# EAGLE board InkTime_PCB (EAGLE 9.7.0), part 1 of 2
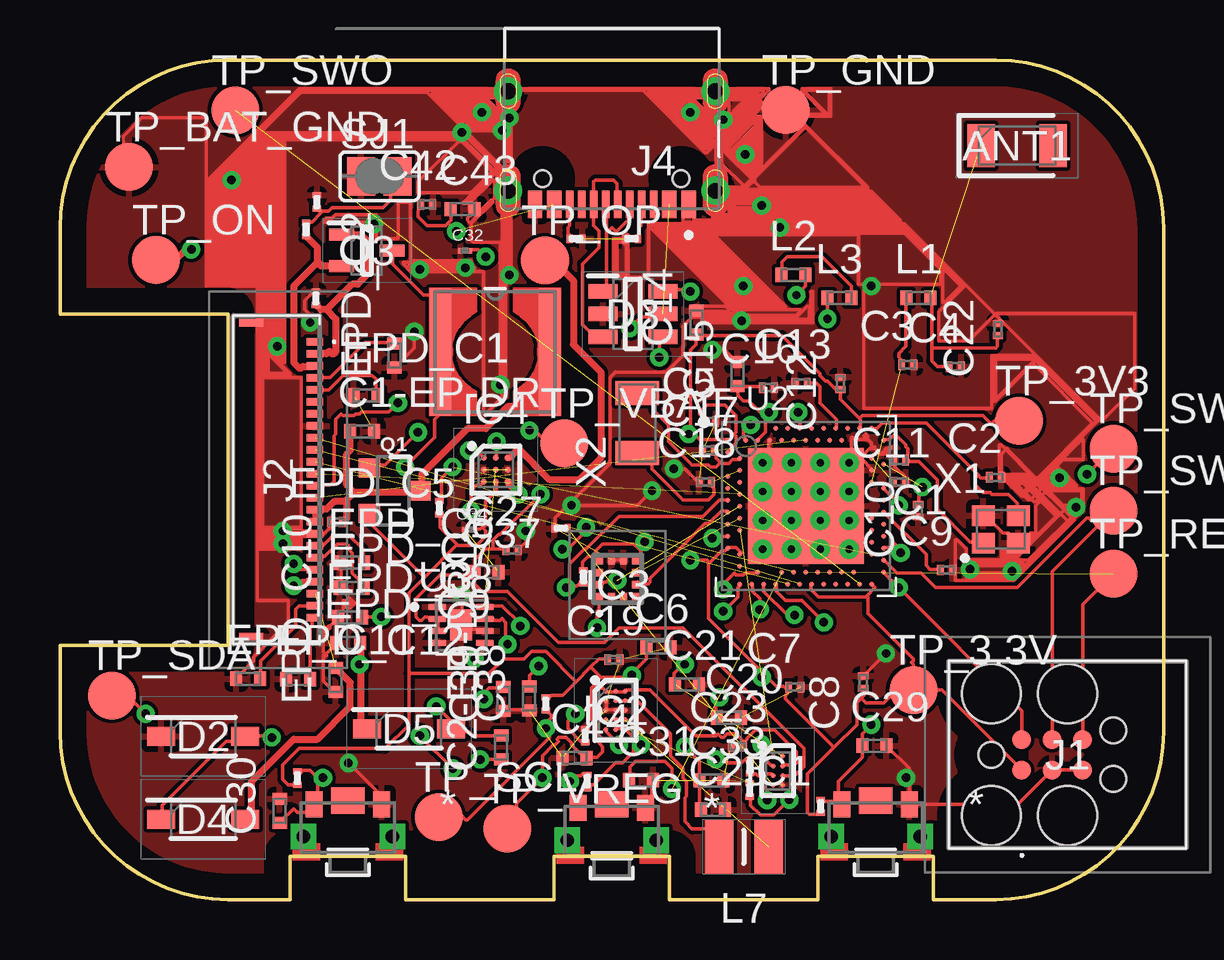
[diagram p0: board, top side]
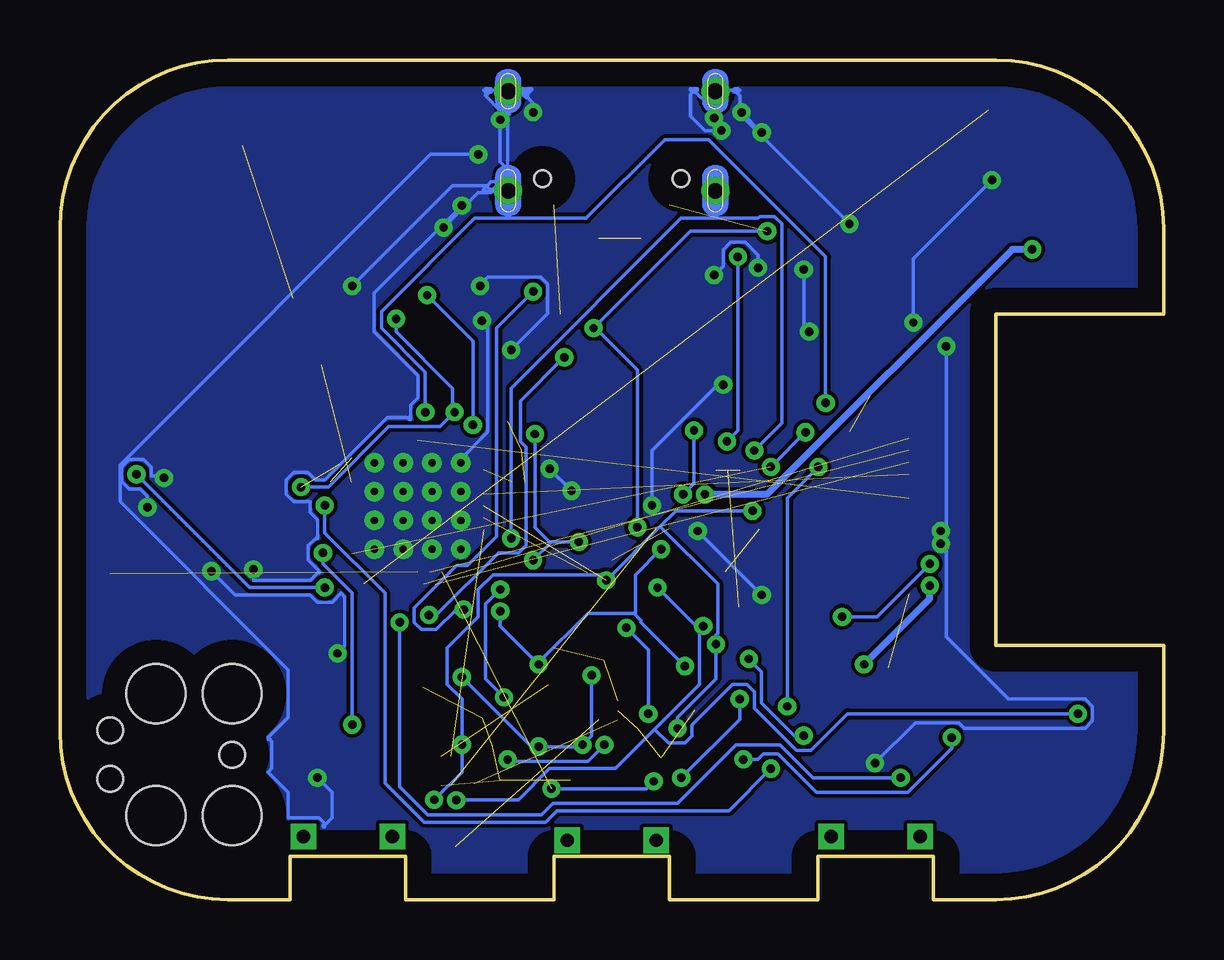
[diagram p1: board, bottom side, seen from below]

Size 46 x 35 mm. Coordinates in mm from the lower left corner, seen from the top.
Outline: 39,0 36.4,0 36.4,1.8 31.6,1.8 31.6,0 25.4,0 25.4,1.8 20.6,1.8 20.6,0 14.4,0 14.4,1.8 9.6,1.8 9.6,0 7,0 arc-90 0,7 0,10.6 7,10.6 7,24.4 0,24.4 0,28 arc-90 7,35 39,35 arc-90 46,28 46,7 arc-90 39,0
Copper layers (1*16): Top 0.035mm / dielectric 1.5mm / Bottom 0.035mm
Design rules "jlcpcb-2layers.dru": minimum track width 6mil, minimum drill 0.35mm, track to track 6mil, track to pad 6mil, pad to pad 6mil, via to via 6mil, smd to smd 6mil, copper to edge 40mil, drill to drill 6mil, minimum pad ring 10mil, minimum via ring 8mil, stop-mask expansion 4mil, vias tented up to drill 9999mil, thermal gap 10mil
Net classes: 1 Power: width 0.3 mm

## Footprints (pad centres in the part's own frame; a part is rotated, then mirrored left to right if it is on the bottom)
2450AT18B100E_ANTC3216X140N = smd 1.15 x 1.8: 1 -1.5,0; 2 1.5,0
NORDIC_NRF_3_RESC0201_L = smd 0.28 x 0.43: 1 -0.255,0; 2 0.255,0
NORDIC_NRF_3_RESC0402_L = smd 0.5 x 0.6: 1 -0.5,0; 2 0.5,0
GRM011R60J152KE01L_2_CAPC0201X13N = smd 0.22 x 0.23: 1 -0.185,0; 2 0.185,0
ESP32_C6_LIBRARY_5_SOD3716X135N = smd 1.15 x 0.8: 1 -1.75,0; 2 1.75,0
ESP32_C6_LIBRARY_3_SOT95P280X145-6N = smd 1.2 x 0.6: 1 -1.25,0.95; 2 -1.25,0; 3 -1.25,-0.95; 4 1.25,-0.95; 5 1.25,0; 6 1.25,0.95
BQ25180YBGR_BGA8C40P2X4_100X155X50 = smd 0.2 x 0.2: A1 -0.2,0.6; A2 0.2,0.6; B1 -0.2,0.2; B2 0.2,0.2; C1 -0.2,-0.2; C2 0.2,-0.2; D1 -0.2,-0.6; D2 0.2,-0.6
RT6160AWSC_BGA15C40P3X5_140X230X60 = smd 0.216 x 0.216: A1 -0.4,0.8; A2 0,0.8; A3 0.4,0.8; B1 -0.4,0.4; B2 0,0.4; B3 0.4,0.4; C1 -0.4,0; C2 0,0; C3 0.4,0; D1 -0.4,-0.4; D2 0,-0.4; D3 0.4,-0.4; E1 -0.4,-0.8; E2 0,-0.8; E3 0.4,-0.8
BMA423_BMA423 = smd 0.3 x 0.35: 1 -0.75,-0.775; 2 -0.25,-0.775; 3 0.25,-0.775; 4 0.75,-0.775; 7 0.75,0.775; 8 0.25,0.775; 9 -0.25,0.775; 10 -0.75,0.775 | smd 0.35 x 0.3: 5 0.775,-0.25; 6 0.775,0.25; 11 -0.775,0.25; 12 -0.775,-0.25
DRV2605YZFR_BGA9C50P3X3_144X144X62 = smd 0.25 x 0.25: A1 -0.5,0.5; A2 0,0.5; A3 0.5,0.5; B1 -0.5,0; B2 0,0; B3 0.5,0; C1 -0.5,-0.5; C2 0,-0.5; C3 0.5,-0.5
TC2030-IDC_TC2030IDC = smd 0.783 x 0.783: 1 -0.953,-0.635; 2 -0.953,0.635; 3 0.317,-0.635; 4 0.317,0.635; 5 1.588,-0.635; 6 1.588,0.635 | hole 2.451: -2.223,-2.54; -2.223,2.54; 0.952,-2.54; 0.952,2.54 | hole 1.067: -2.223,0; 2.857,-1.016; 2.857,1.016
503480-2400_5034802400 = smd 0.3 x 0.7: 1 -5.75,1.525; 2 -5.25,1.525; 3 -4.75,1.525; 4 -4.25,1.525; 5 -3.75,1.525; 6 -3.25,1.525; 7 -2.75,1.525; 8 -2.25,1.525; 9 -1.75,1.525; 10 -1.25,1.525; 11 -0.75,1.525; 12 -0.25,1.525; 13 0.25,1.525; 14 0.75,1.525; 15 1.25,1.525; 16 1.75,1.525; 17 2.25,1.525; 18 2.75,1.525; 19 3.25,1.525; 20 3.75,1.525; 21 4.25,1.525; 22 4.75,1.525; 23 5.25,1.525; 24 5.75,1.525 | smd 0.3 x 1: MP1 -6.54,-1.125; MP2 6.54,-1.125
KH-TYPE-C-16P_KINGHELM_KH-TYPE-C-16P = smd 0.6 x 1.15: A1_B12 -3.2,4.725; A4_B9 -2.4,4.725; A9_B4 2.4,4.725; A12_B1 3.2,4.725 | smd 0.3 x 1.15: A5 -1.25,4.725; A6 -0.25,4.725; A7 0.25,4.725; A8 1.25,4.725; B5 1.75,4.725; B6 0.75,4.725; B7 -0.75,4.725; B8 -1.75,4.725 | drill 0.65 pad 1.05: SH1 -4.32,0; SH2 4.32,0; SH3 -4.32,4.15; SH4 4.32,4.15 | hole 0.7: -2.89,3.65; 2.89,3.65
NORDIC_NRF_2_RESC0402_L = smd 0.5 x 0.6: 1 -0.5,0; 2 0.5,0
ESP32_C6_LIBRARY_2_IND_4828-WE-TPC_WRE = smd 0.9 x 5.3: 1 -2.286,0; 2 2.286,0
MLP2016SR47MT0S1_INDC2016X100N = smd 1.2 x 2.2: 1 -1.028,0; 2 1.028,0
ESP32_C6_LIBRARY_4_ESP32_C6_LIBRARY_4_ESP32_C6_LIBRARY_4_ESP32_C6_LIBRARY_4_ESP32_WROVER_SPARKFUN-DISCRETESEMI_SOT23-3 = smd 0.8 x 0.9: 1 -0.95,-1; 2 0.95,-1; 3 0,1.1
ESP32_C6_LIBRARY_6_SOT65P210X110-3N = smd 1.05 x 0.5: 1 -1.05,0.65; 2 -1.05,-0.65; 3 1.05,0
CPF0201D7K68C1_0201 = smd 0.35 x 0.25: 1 0,0.275; 2 0,-0.275
ERA-1AEB3401C_0201 = smd 0.35 x 0.25: 1 0,0.275; 2 0,-0.275
ESP32_C6_LIBRARY_7_JUMPER_SJ = smd 1.168 x 1.6: 1 -0.762,0; 2 0.762,0
2025-10-22_07-23-44_LIBRARY_SW_EVP-AKE31A_PAN = smd 0.711 x 1.092: 1 -1.4,-0.972; 2 1.4,-0.972 | drill 0.559 pad 0.914 square: 3 -1.848,0.381; 4 1.848,0.381 | smd 1.397 x 1.092: 5 0,-1.124
HECTOR_WATCH_1_TP20R = smd 2 x 2: TP 0,0
NORDIC_NRF_4_AQFN50P700X700X85_HS-74N = smd 4.85 x 4.85: P$74 0,0 | drill 0.3 pad 0.6: P$75 -1.8,1.8; P$76 -0.6,1.8; P$77 0.6,1.8; P$78 1.8,1.8; P$79 -1.8,0.6; P$80 -0.6,0.6; P$81 0.6,0.6; P$82 1.8,0.6; P$83 -1.8,-0.6; P$84 -0.6,-0.6; P$85 0.6,-0.6; P$86 1.8,-0.6; P$87 -1.8,-1.8; P$88 -0.6,-1.8; P$89 0.6,-1.8; P$90 1.8,-1.8 | smd 0.2 x 0.2: P$A8 -1.25,3.25; P$A10 -0.75,3.25; P$A12 -0.25,3.25; P$A14 0.25,3.25; P$A16 0.75,3.25; P$A18 1.25,3.25; P$A20 1.75,3.25; P$A22 2.25,3.25; P$A23 2.75,3.25; P$AA24 3.25,-2.25; P$AB2 -2.75,-2.5; P$AC5 -2,-2.75; P$AC9 -1,-2.75; P$AC11 -0.5,-2.75; P$AC13 0,-2.75; P$AC15 0.5,-2.75; P$AC17 1,-2.75; P$AC19 1.5,-2.75; P$AC21 2,-2.75; P$AC24 3.25,-2.75; P$AD2 -2.75,-3.25; P$AD4 -2.25,-3.25; P$AD6 -1.75,-3.25; P$AD8 -1.25,-3.25; P$AD10 -0.75,-3.25; P$AD12 -0.25,-3.25; P$AD14 0.25,-3.25; P$AD16 0.75,-3.25; P$AD18 1.25,-3.25; P$AD20 1.75,-3.25; P$AD22 2.25,-3.25; P$AD23 2.75,-3.25; P$B1 -3.25,2.75; P$B3 -2.5,2.75; P$B5 -2,2.75; P$B7 -1.5,2.75; P$B9 -1,2.75; P$B11 -0.5,2.75; P$B13 0,2.75; P$B15 0.5,2.75; P$B17 1,2.75; P$B19 1.5,2.75; P$B24 3.25,2.75; P$C1 -3.25,2.25; P$D2 -2.75,2; P$D23 2.75,2; P$E24 3.25,1.75; P$F2 -2.75,1.5; P$F23 2.75,1.5; P$G1 -3.25,1.25; P$H2 -2.75,1; P$H23 2.75,1; P$J1 -3.25,0.75; P$J24 3.25,0.75; P$K2 -2.75,0.5; P$L1 -3.25,0.25; P$L24 3.25,0.25; P$M2 -2.75,0; P$N1 -3.25,-0.25; P$N24 3.25,-0.25; P$P2 -2.75,-0.5; P$P23 2.75,-0.5; P$R1 -3.25,-0.75; P$R24 3.25,-0.75; P$T2 -2.75,-1; P$T23 2.75,-1; P$U1 -3.25,-1.25; P$U24 3.25,-1.25; P$V23 2.75,-1.5; P$W1 -3.25,-1.75; P$W24 3.25,-1.75; P$Y2 -2.75,-2; P$Y23 2.75,-2
ESP32_C6_LIBRARY_SON50P200X200X80-9N = smd 0.76 x 0.27: 1 -0.985,0.75; 2 -0.985,0.25; 3 -0.985,-0.25; 4 -0.985,-0.75; 5 0.985,-0.75; 6 0.985,-0.25; 7 0.985,0.25; 8 0.985,0.75 | smd 0.9 x 1.3: 9 0,0
NORDIC_NRF_BT-XTAL_2016_N = smd 0.95 x 0.85: 1 -0.725,-0.575; 2 0.725,-0.575; 3 0.725,0.575; 4 -0.725,0.575
NORDIC_NRF_1_XTAL_3215_N = smd 1 x 1.8: 1 -1.25,0; 2 1.25,0

## Placement (x,y rotation side)
ANT1  2450AT18B100E  [2450AT18B100E_ANTC3216X140N]  39.89,31.43 0 top
C1  12pF  [NORDIC_NRF_3_RESC0201_L]  34.99,18.31 180 top
C1-EP-DR  10uF  [NORDIC_NRF_3_RESC0402_L]  12.59,19.52 0 top
C2  12pF  [NORDIC_NRF_3_RESC0201_L]  38.99,17.6 0 top
C2-EP-DR1  4.7uF/25V  [NORDIC_NRF_3_RESC0402_L]  18.39,6.34 90 top
C3  1pF  [NORDIC_NRF_3_RESC0201_L]  35.34,22.29 0 top
C4  1pF  [NORDIC_NRF_3_RESC0201_L]  37.32,22.21 0 top
C5  100nF  [NORDIC_NRF_3_RESC0201_L]  27.08,19.92 0 top
C6  4.7µF  [NORDIC_NRF_3_RESC0402_L]  24.95,10.51 0 top
C7  100nF  [NORDIC_NRF_3_RESC0201_L]  30.63,8.86 0 top
C8  100nF  [NORDIC_NRF_3_RESC0201_L]  33.48,9.07 90 top
C9  820pF  [NORDIC_NRF_3_RESC0201_L]  36.95,13.74 0 top
C10  [NORDIC_NRF_3_RESC0201_L]  35.78,16.22 90 top
C11  100pF  [NORDIC_NRF_3_RESC0201_L]  35,17.41 0 top
C12  100nF  [NORDIC_NRF_3_RESC0201_L]  32.53,21.52 90 top
C13  [NORDIC_NRF_3_RESC0201_L]  30.89,21.53 0 top
C14  4.7µF  [NORDIC_NRF_3_RESC0402_L]  26.53,24.05 90 top
C15  1.0µF  [NORDIC_NRF_3_RESC0402_L]  28.24,21.91 90 top
C16  47nF  [NORDIC_NRF_3_RESC0201_L]  29.53,21.34 0 top
C17  12pF  [NORDIC_NRF_3_RESC0201_L]  27.03,18.73 0 top
C18  12pF  [NORDIC_NRF_3_RESC0201_L]  26.9,17.41 0 top
C19  100nF  [NORDIC_NRF_3_RESC0201_L]  23.09,10 0 top
C20  4.7µF  [NORDIC_NRF_3_RESC0402_L]  27.88,7.58 0 top
C21  4.7µF  [NORDIC_NRF_3_RESC0402_L]  26.13,8.97 0 top
C22  N.C.  [NORDIC_NRF_3_RESC0201_L]  39.09,23.77 90 top
C23  0.1uF  [NORDIC_NRF_3_RESC0201_L]  28.23,6.39 0 top
C24  10uF  [NORDIC_NRF_3_RESC0402_L]  21.45,5.9 0 top
C25  22uF  [NORDIC_NRF_3_RESC0402_L]  27.21,3.74 0 top
C27  0.1uF  [NORDIC_NRF_3_RESC0201_L]  18.85,14.57 0 top
C29  1uF  [NORDIC_NRF_3_RESC0402_L]  33.95,6.41 0 top
C30  1uF  [NORDIC_NRF_3_RESC0402_L]  9.17,3.69 90 top
C31  1uF  [NORDIC_NRF_3_RESC0402_L]  24.21,4.97 0 top
C32  1uF  [GRM011R60J152KE01L_2_CAPC0201X13N]  16.88,27.04 0 top
C33  22uF  [NORDIC_NRF_3_RESC0402_L]  27.15,4.97 0 top
C34  0.1uF  [GRM011R60J152KE01L_2_CAPC0201X13N]  17.05,15.42 0 top
C37  1uF  [NORDIC_NRF_3_RESC0402_L]  17.78,13.65 0 top
C38  1uF  [NORDIC_NRF_3_RESC0402_L]  19.56,8.38 90 top
C39  10uF  [NORDIC_NRF_3_RESC0402_L]  18.48,8.36 90 top
C42  0.1uF  [NORDIC_NRF_3_RESC0201_L]  15.29,28.98 0 top
C43  4.7uF  [NORDIC_NRF_3_RESC0402_L]  16.79,28.78 0 top
D2  MBR0530  [ESP32_C6_LIBRARY_5_SOD3716X135N]  5.97,6.8 0 top
D3  USBLC6-2SC6Y  [ESP32_C6_LIBRARY_3_SOT95P280X145-6N]  23.88,24.41 0 top
D4  MBR0530  [ESP32_C6_LIBRARY_5_SOD3716X135N]  5.97,3.35 0 top
D5  MBR0530  [ESP32_C6_LIBRARY_5_SOD3716X135N]  14.55,7.12 0 top
EPD_C1  1uF/50V  [NORDIC_NRF_3_RESC0402_L]  12.74,21.02 0 top
EPD_C2  1uF/50V  [NORDIC_NRF_3_RESC0402_L]  13.94,22.67 90 top
EPD_C5  0.1uF/50V  [NORDIC_NRF_3_RESC0201_L]  11.52,15.74 0 top
EPD_C6  1uF/50V  [NORDIC_NRF_3_RESC0402_L]  12.17,14.05 0 top
EPD_C7  1uF/50V  [NORDIC_NRF_3_RESC0402_L]  12.15,13 0 top
EPD_C8  1uF/50V  [NORDIC_NRF_3_RESC0402_L]  12.09,11.77 0 top
EPD_C9  1uF/50V  [NORDIC_NRF_3_RESC0402_L]  12.01,10.7 0 top
EPD_C10  1uF/50V  [NORDIC_NRF_3_RESC0402_L]  11.49,9.15 90 top
EPD_C11  1uF/50V  [NORDIC_NRF_3_RESC0402_L]  7.85,9.21 0 top
EPD_C12  1uF/50V  [NORDIC_NRF_3_RESC0402_L]  9.93,9.19 0 top
IC1  BQ25180YBGR_BQ25180YBGR  [BQ25180YBGR_BGA8C40P2X4_100X155X50]  29.92,5.37 0 top
IC2  RT6160AWSC_RT6160AWSC  [RT6160AWSC_BGA15C40P3X5_140X230X60]  23.16,7.89 0 top
IC3  BMA421  [BMA423_BMA423]  23.24,13.37 0 top
IC4  DRV2605YZFR  [DRV2605YZFR_BGA9C50P3X3_144X144X62]  18.16,17.91 0 top
J1  TC2030-IDC_TC2030-IDC  [TC2030-IDC_TC2030IDC]  41.05,6.04 0 top
J2  503480-2400  [503480-2400_5034802400]  9.1,17.5 270 top
J4  KH-TYPE-C-16P  [KH-TYPE-C-16P_KINGHELM_KH-TYPE-C-16P]  23,33.7 180 top
L1  3.9nH  [NORDIC_NRF_2_RESC0402_L]  35.79,25.08 0 top
L2  10µH  [NORDIC_NRF_2_RESC0402_L]  30.57,26.04 0 top
L3  15nF  [NORDIC_NRF_2_RESC0402_L]  32.49,25.08 0 top
L5  68uH  [ESP32_C6_LIBRARY_2_IND_4828-WE-TPC_WRE]  18.14,22.83 0 top
L7  FTC252012SR47MBCA  [MLP2016SR47MT0S1_INDC2016X100N]  28.51,2.19 0 top
Q1  20V/4.2A/52mΩ/1.4W  [ESP32_C6_LIBRARY_4_ESP32_C6_LIBRARY_4_ESP32_C6_LIBRARY_4_ESP32_C6_LIBRARY_4_ESP32_WROVER_SPARKFUN-DISCRETESEMI_SOT23-3]  13.9,17.04 270 top
Q3  SI1308EDL-T1-GE3  [ESP32_C6_LIBRARY_6_SOT65P210X110-3N]  12.79,27.06 0 top
R1_EP_DR  0.47  [CPF0201D7K68C1_0201]  10.26,27.94 0 top
R1_USB  5K1  [ERA-1AEB3401C_0201]  23.82,27.55 90 top
R2  0  [ERA-1AEB3401C_0201]  28.76,5.54 0 top
R2_EP_DR  10K  [CPF0201D7K68C1_0201]  10.67,25.06 0 top
R2_USB  5K1  [ERA-1AEB3401C_0201]  21.51,27.55 90 top
R3  0  [ERA-1AEB3401C_0201]  21.9,6.83 0 top
R4  0  [ERA-1AEB3401C_0201]  28.75,4.56 0 top
R5  10k  [CPF0201D7K68C1_0201]  9.89,5.06 0 top
R7  10k  [CPF0201D7K68C1_0201]  31.71,3.88 0 top
R8  10k  [CPF0201D7K68C1_0201]  21.97,4.92 0 top
R9  10k  [ERA-1AEB3401C_0201]  20.89,15.47 90 top
R17  3K3  [ERA-1AEB3401C_0201]  20.25,8.16 0 top
R18  3K3  [ERA-1AEB3401C_0201]  21.82,13.45 0 top
R_PWR_EPD  10K  [CPF0201D7K68C1_0201]  15.81,16.33 0 top
R_TYPE_SEL  2.2  [CPF0201D7K68C1_0201]  10.71,29.08 0 top
SJ1  [ESP32_C6_LIBRARY_7_JUMPER_SJ]  13.32,30.15 0 top
SW_DN  2025-10-22_07-23-44_LIBRARY_EVP-AKE31ASW_EVP-AKE31A_PAN  [2025-10-22_07-23-44_LIBRARY_SW_EVP-AKE31A_PAN]  34,3 180 top
SW_ENT  SW_ENT  [2025-10-22_07-23-44_LIBRARY_SW_EVP-AKE31A_PAN]  23,2.85 180 top
SW_UP  2025-10-22_07-23-44_LIBRARY_EVP-AKE31ASW_EVP-AKE31A_PAN  [2025-10-22_07-23-44_LIBRARY_SW_EVP-AKE31A_PAN]  12,3 180 top
TP_3.3V  HECTOR_WATCH_1_TPTP20R  [HECTOR_WATCH_1_TP20R]  35.58,8.73 0 top
TP_3V3  HECTOR_WATCH_1_TPTP20R  [HECTOR_WATCH_1_TP20R]  39.97,19.95 0 top
TP_BAT_GND  HECTOR_WATCH_1_TPTP20R  [HECTOR_WATCH_1_TP20R]  2.88,30.54 0 top
TP_GND  HECTOR_WATCH_1_TPTP20R  [HECTOR_WATCH_1_TP20R]  30.25,32.91 0 top
TP_ON  HECTOR_WATCH_1_TPTP20R  [HECTOR_WATCH_1_TP20R]  4,26.66 0 top
TP_OP  HECTOR_WATCH_1_TPTP20R  [HECTOR_WATCH_1_TP20R]  20.22,26.64 0 top
TP_RESET  HECTOR_WATCH_1_TPTP20R  [HECTOR_WATCH_1_TP20R]  43.91,13.57 0 top
TP_SCL  HECTOR_WATCH_1_TPTP20R  [HECTOR_WATCH_1_TP20R]  15.79,3.43 0 top
TP_SDA  HECTOR_WATCH_1_TPTP20R  [HECTOR_WATCH_1_TP20R]  2.16,8.51 0 top
TP_SWDCLK  HECTOR_WATCH_1_TPTP20R  [HECTOR_WATCH_1_TP20R]  43.91,16.22 0 top
TP_SWDIO  HECTOR_WATCH_1_TPTP20R  [HECTOR_WATCH_1_TP20R]  43.91,18.8 0 top
TP_SWO  HECTOR_WATCH_1_TPTP20R  [HECTOR_WATCH_1_TP20R]  7.31,32.9 0 top
TP_VBAT  HECTOR_WATCH_1_TPTP20R  [HECTOR_WATCH_1_TP20R]  21.02,19.02 0 top
TP_VREG  HECTOR_WATCH_1_TPTP20R  [HECTOR_WATCH_1_TP20R]  18.64,2.95 0 top
U2  NRF52840_QF  [NORDIC_NRF_4_AQFN50P700X700X85_HS-74N]  31.09,16.41 0 top
U3  MAX17048G+T10  [ESP32_C6_LIBRARY_SON50P200X200X80-9N]  16.72,11.45 0 top
X1  32MHz  [NORDIC_NRF_BT-XTAL_2016_N]  39.22,15.43 0 top
X2  32.768kHz  [NORDIC_NRF_1_XTAL_3215_N]  24.06,19.87 90 top

## Library data of the parts
ANT1 = InkTime_v5; ARROW_PART_NUMBER: 2450AT18B100E; ARROW_PRICE-STOCK: https://www.arrow.com/en/products/2450at18b100e/johanson-dielectrics?utm_currency=USD&region=nac; DESCRIPTION: Antennas 2.45GHz ANTENNA; HEIGHT: 1.4mm; MANUFACTURER_NAME: JOHANSON TECHNOLOGY; MANUFACTURER_PART_NUMBER: 2450AT18B100E; MOUSER_PART_NUMBER: 609-2450AT18B100E; MOUSER_PRICE-STOCK: https://www.mouser.co.uk/ProductDetail/Johanson-Technology/2450AT18B100E?qs=yCnrNFeXz%252Bh5MFsFIXGZGA%3D%3D
C1 C1-EP-DR C2 C2-EP-DR1 C3-C25 C27 C29-C31 C33 C37-C39 C42 C43 EPD_C1 EPD_C2 EPD_C5-EPD_C12 L1-L3 R1_EP_DR R1_USB R2 R2_EP_DR R2_USB R3-R5 R7-R9 R17 R18 R_PWR_EPD R_TYPE_SEL SJ1 TP_3.3V TP_3V3 TP_BAT_GND TP_GND TP_ON TP_OP TP_RESET TP_SCL TP_SDA TP_SWDCLK TP_SWDIO TP_SWO TP_VBAT TP_VREG U2 X1 X2 = InkTime_v5
C32 C34 = InkTime_v5; AVAILABILITY: In Stock; CHECK_PRICES: https://www.snapeda.com/parts/GRM011R60J152KE01L/Murata/view-part/?ref=eda; DESCRIPTION: SMD Capacitor X5R(EIA) with Capacitance: 1500pF Tol. 10%. Rated Voltage: 6.3Vdc; MF: Murata; MP: GRM011R60J152KE01L; PACKAGE: 0201 Murata; PRICE: None; SNAPEDA_LINK: https://www.snapeda.com/parts/GRM011R60J152KE01L/Murata/view-part/?ref=snap
D2 D4 D5 = InkTime_v5; AVAILABILITY: In Stock; CHECK_PRICES: https://www.snapeda.com/parts/MBR0530/Onsemi/view-part/?ref=eda; DESCRIPTION: Diode Schottky 30 V 500mA Surface Mount SOD-123; MF: ON Semiconductor; MP: MBR0530; PACKAGE: SOD-123-2 ON Semiconductor; PRICE: None; PURCHASE-URL: https://www.snapeda.com/api/url_track_click_mouser/?unipart_id=179458&manufacturer=ON Semiconductor&part_name=MBR0530&search_term=None; SNAPEDA_LINK: https://www.snapeda.com/parts/MBR0530/Onsemi/view-part/?ref=snap
D3 = InkTime_v5; AVAILABILITY: In Stock; CHECK_PRICES: https://www.snapeda.com/parts/USBLC6-2SC6Y/STMicroelectronics/view-part/?ref=eda; DESCRIPTION: 17V Clamp 5A (8/20µs) Ipp Tvs Diode Surface Mount SOT-23-6; MF: STMicroelectronics; MP: USBLC6-2SC6Y; PACKAGE: SOT-23-6 STMicroelectronics; PRICE: None; SNAPEDA_LINK: https://www.snapeda.com/parts/USBLC6-2SC6Y/STMicroelectronics/view-part/?ref=snap
IC1 = InkTime_v5; ARROW_PART_NUMBER: BQ25180YBGR; ARROW_PRICE-STOCK: https://www.arrow.com/en/products/bq25180ybgr/texas-instruments?utm_currency=USD&region=nac; DESCRIPTION: Charger IC Lithium Ion/Polymer, Lithium Iron Phosphate 8-DSBGA (1.6x1.1); HEIGHT: 0.5mm; MANUFACTURER_NAME: Texas Instruments; MANUFACTURER_PART_NUMBER: BQ25180YBGR; MOUSER_PART_NUMBER: 595-BQ25180YBGR; MOUSER_PRICE-STOCK: https://www.mouser.co.uk/ProductDetail/Texas-Instruments/BQ25180YBGR?qs=doiCPypUmgEWjAK%252BJAX6Tw%3D%3D
IC2 = InkTime_v5; DESCRIPTION: Buck-Boost Regulator Positive Output Step-Up/Step-Down I2C DC-DC Controller IC 15-WL-CSP (BSC) (1.4x2.3); HEIGHT: 0.6mm; MANUFACTURER_NAME: RICHTEK; MANUFACTURER_PART_NUMBER: RT6160AWSC; MOUSER_PART_NUMBER: 835-RT6160AWSC; MOUSER_PRICE-STOCK: https://www.mouser.co.uk/ProductDetail/Richtek/RT6160AWSC?qs=amGC7iS6iy%2FLd9PSoixZXQ%3D%3D
IC3 = InkTime_v5; ARROW_PART_NUMBER: BMA423; ARROW_PRICE-STOCK: https://www.arrow.com/en/products/bma423/bosch; DESCRIPTION: Accelerometers Triaxial low-g 12bit Acceleration Sensor; HEIGHT: 1mm; MANUFACTURER_NAME: BOSCH; MANUFACTURER_PART_NUMBER: BMA423; MOUSER_PART_NUMBER: 262-BMA423; MOUSER_PRICE-STOCK: https://www.mouser.co.uk/ProductDetail/Bosch-Sensortec/BMA423?qs=HXFqYaX1Q2xC%252BSgeGoX3mg%3D%3D
IC4 = InkTime_v5; ARROW_PART_NUMBER: DRV2605YZFR; ARROW_PRICE-STOCK: https://www.arrow.com/en/products/drv2605yzfr/texas-instruments?region=nac; DESCRIPTION: Haptic Driver for ERM/LRA with Built-In Library and Smart Loop Architecture; HEIGHT: 0.625mm; MANUFACTURER_NAME: Texas Instruments; MANUFACTURER_PART_NUMBER: DRV2605YZFR
J1 = InkTime_v5; DESCRIPTION: CABLE ADAPTER 6 POS; HEIGHT: 19mm; MANUFACTURER_NAME: Tag Connect; MANUFACTURER_PART_NUMBER: TC2030-IDC
J2 = InkTime_v5; DESCRIPTION: FFC & FPC Connectors 0.5mm FPC RA SMT Dual Contact 24Ckt; HEIGHT: 1.87mm; MANUFACTURER_NAME: Molex; MANUFACTURER_PART_NUMBER: 503480-2400; MOUSER_PART_NUMBER: 538-503480-2400; MOUSER_PRICE-STOCK: https://www.mouser.co.uk/ProductDetail/Molex/503480-2400?qs=OAhjpuo3Vu7efIoxFh9AOw%3D%3D
J4 = InkTime_v5; AVAILABILITY: Not in stock; CHECK_PRICES: https://www.snapeda.com/parts/KH-TYPE-C-16P/Kinghelm/view-part/?ref=eda; MF: kinghelm; MP: KH-TYPE-C-16P; PACKAGE: None; PRICE: None; SNAPEDA_LINK: https://www.snapeda.com/parts/KH-TYPE-C-16P/Kinghelm/view-part/?ref=snap
L5 = InkTime_v5; COPYRIGHT: Copyright (C) 2024 Ultra Librarian. All rights reserved.; MANUFACTURER_PART_NUMBER: 744043680; MFR_NAME: Wurth Electronics
L7 = InkTime_v5; DESCRIPTION: SMD / SMT Inductors (Coils), L=0.47?H, L x W x T :; HEIGHT: 1mm; JLCPCB: https://jlcpcb.com/partdetail/6763488-FTC252012SR47MBCA/C5832368; MANUFACTURER_NAME: TDK; MANUFACTURER_PART_NUMBER: FTC252012SR47MBCA
Q1 = InkTime_v5; PROD_ID: TRAN-14388
Q3 = InkTime_v5; AVAILABILITY: In Stock; CHECK_PRICES: https://www.snapeda.com/parts/SI1308EDL-T1-GE3/Vishay+Siliconix/view-part/?ref=eda; DESCRIPTION: Si1308EDL-T1-GE3 N-channel MOSFET Transistor, 1.5 A, 30 V, 3-Pin SC-70 | Siliconix / Vishay SI1308EDL-T1-GE3; MF: Vishay Siliconix; MP: SI1308EDL-T1-GE3; PACKAGE: SOT-323 Vishay Semiconductor; PRICE: None; PURCHASE-URL: https://www.snapeda.com/api/url_track_click_mouser/?unipart_id=274603&manufacturer=Vishay Siliconix&part_name=SI1308EDL-T1-GE3&search_term=None; SNAPEDA_LINK: https://www.snapeda.com/parts/SI1308EDL-T1-GE3/Vishay+Siliconix/view-part/?ref=snap
SW_DN SW_ENT SW_UP = InkTime_v5; COPYRIGHT: Copyright (C) 2025 Ultra Librarian. All rights reserved.; DIGI-KEY_PART_NUMBER_1: P123437TR-ND; DIGI-KEY_PART_NUMBER_2: P123437CT-ND; DIGI-KEY_PART_NUMBER_3: P123437DKR-ND; MANUFACTURER_NAME: Panasonic; MANUFACTURER_PART_NUMBER: EVP-AKE31A
U3 = InkTime_v5; AVAILABILITY: In Stock; CHECK_PRICES: https://www.snapeda.com/parts/MAX17048G+T10/Analog+Devices/view-part/?ref=eda; DESCRIPTION: 3µA 1-Cell/2-Cell Fuel Gauge with ModelGauge; MF: Analog Devices; MP: MAX17048G+T10; PACKAGE: TDFN-8 Maxim; PRICE: None; PURCHASE-URL: https://www.snapeda.com/api/url_track_click_mouser/?unipart_id=329239&manufacturer=Analog Devices&part_name=MAX17048G+T10&search_term=None; SNAPEDA_LINK: https://www.snapeda.com/parts/MAX17048G+T10/Analog+Devices/view-part/?ref=snap

## Nets
3V3: C6.1 C7.1 C8.1 C12.1 C14.1 C19.1 C25.1 C33.1 C34.2 IC2.E2 IC2.E3 IC3.7 IC3.10 IC4.C2 J1.1 Q1.2 R5.2 R7.2 R8.2 R17.1 R18.1 R_PWR_EPD.2 TP_3.3V.TP TP_3V3.TP U2.P$A22 U2.P$AD14 U2.P$AD23 U2.P$B1 U2.P$W1 U2.P$Y2
ALERT: U2.P$J24 U3.5
D+: D3.4 U2.P$AD6
D-: D3.6 U2.P$AD4
DEC3: C11.1 U2.P$D23
DEC4_6: C10.2 C15.1 C16.1 L3.1 U2.P$B5 U2.P$E24
DN: D3.1 J4.A7 J4.B7
DP: D3.3 J4.A6 J4.B6
EPD_3V3 [Power]: C1-EP-DR.1 EPD_C5.2 J2.15 J2.16 L5.2 Q1.3
EPD_BUSY: J2.9 U2.P$AD12
EPD_CS: J2.12 U2.P$K2
EPD_DC: J2.11 U2.P$AD10
EPD_RST: J2.10 U2.P$AC11
GDR [Power]: J2.2 Q3.1 R2_EP_DR.2
GND: C1-EP-DR.2 C1.2 C2.2 C3.2 C4.2 C5.2 C6.2 C7.2 C8.2 C9.2 C10.1 C11.2 C12.2 C13.1 C14.2 C15.2 C16.2 C17.1 C18.1 C19.2 C20.2 C21.2 C22.2 C23.1 C24.1 C25.2 C27.2 C29.2 C30.2 C31.2 C32.1 C33.2 C34.1 C37.2 C38.1 C39.1 C42.2 C43.2 D2.1 D3.2 EPD_C1.1 EPD_C2.1 EPD_C5.1 EPD_C6.1 EPD_C7.1 EPD_C8.1 EPD_C9.1 EPD_C10.1 EPD_C11.1 EPD_C12.1 IC1.D2 IC2.B1 IC2.C1 IC2.C2 IC2.C3 IC3.8 IC3.9 IC4.B1 IC4.B3 J1.3 J1.5 J2.8 J2.17 J2.MP1 J2.MP2 J4.A1_B12 J4.A12_B1 J4.SH1 J4.SH2 J4.SH3 J4.SH4 R1_USB.1 R2_EP_DR.1 R2_USB.2 R3.1 R9.1 R_TYPE_SEL.1 SJ1.1 SW_DN.1 SW_ENT.1 SW_UP.1 TP_BAT_GND.TP TP_GND.TP U2.P$74 U2.P$75 U2.P$76 U2.P$77 U2.P$78 U2.P$79 U2.P$80 U2.P$81 U2.P$82 U2.P$83 U2.P$84 U2.P$85 U2.P$86 U2.P$87 U2.P$88 U2.P$89 U2.P$90 U2.P$B7 U2.P$F23 U3.1 U3.4 U3.6 U3.9 X1.2 X1.4
HAPTIC_EN: IC4.A1 U2.P$U1
IMU_INT1: IC3.5 U2.P$N1
IMU_INT2: IC3.6 U2.P$P2
LX1: IC2.B2 IC2.B3 L7.1
LX2: IC2.D2 IC2.D3 L7.2
MOSI: J2.14 U2.P$B13
N$1: IC1.D1 R9.2
N$2: IC3.1 R3.2
N$3: IC3.2
N$6: IC3.3
N$7: IC2.D1 R4.1
N$8: C2-EP-DR1.2 D5.2 L5.1 Q3.3
N$9: IC2.E1 R2.1
N$10: C5.1 U2.P$C1
N$14: C3.1 L1.1 U2.P$H23
N$15: ANT1.1 C4.1 C22.1 L1.2
N$17: C2.1 U2.P$A23 X1.3
N$18: C1.1 U2.P$B24 X1.1
N$19: L2.1 L3.2
N$20: L2.2 U2.P$B3
N$21: C13.2 U2.P$A18
N$22: C20.1 U2.P$AC5
N$23: EPD_C8.2 J2.20
N$24: C9.1 U2.P$N24
N$25: C2-EP-DR1.1 D2.2 D4.1
N$27: EPD_C2.2 J2.4
N$29: R1_EP_DR.1 R_TYPE_SEL.2 SJ1.2
N$31: EPD_C1.2 J2.5
N$32: C32.2 IC4.A2
N$34: J4.B5 R2_USB.1
N$37: J4.A5 R1_USB.2
N$39: EPD_C7.2 J2.19
N$41: EPD_C6.2 J2.18
N$42: EPD_C11.2 J2.23
N$44: EPD_C12.2 J2.24
OUT+ [Power]: IC4.A3 TP_OP.TP
OUT- [Power]: IC4.C3 TP_ON.TP
P0.00/XL1: C17.2 U2.P$D2 X2.2
P0.00/XL2: C18.2 U2.P$F2 X2.1
P0.04: U2.P$J1
P0.09: U2.P$L24
P0.13: C30.1 R5.1 SW_UP.2 U2.P$AD8
P0.14: C31.1 R8.1 SW_ENT.2 U2.P$AC9
P0.19: U2.P$AC15
P0.20: U2.P$AD16
P0.21: U2.P$AC17
P0.22: U2.P$AD18
P0.23: U2.P$AC19
P0.24: U2.P$AD20
P0.25: U2.P$AC21
P0.26: U2.P$G1
P0.27: U2.P$H2
P0.28: U2.P$B11
P0.29: U2.P$A10
P0.30: U2.P$B9
P0.31: U2.P$A8
P1.01: Q1.1 R_PWR_EPD.1 U2.P$Y23
P1.02: C29.1 R7.1 SW_DN.2 U2.P$W24
P1.03: U2.P$V23
P1.04: U2.P$U24
P1.05: U2.P$T23
P1.06: U2.P$R24
P1.07: U2.P$P23
P1.09: U2.P$R1
P1.10: U2.P$A20
P1.11: U2.P$B19
P1.12: U2.P$B17
P1.13: U2.P$A16
P1.14: U2.P$B15
P1.15: U2.P$A14
PMIC_INT: IC1.A1 U2.P$T2
PREVGH [Power]: D5.1 EPD_C9.2 J2.21
PREVGL [Power]: D4.2 EPD_C10.2 J2.22
RESE [Power]: J2.3 Q3.2 R1_EP_DR.2
RESET: J1.6 TP_RESET.TP U2.P$AC13
SCK: J2.13 U2.P$A12
SCL: IC1.B1 IC3.12 IC4.C1 R4.2 R17.2 TP_SCL.TP U2.P$M2 U3.7
SDA: IC1.C1 IC4.B2 R2.2 R18.2 TP_SDA.TP U2.P$L1 U3.8
SWDCLK: J1.4 TP_SWDCLK.TP U2.P$AA24
SWDIO: J1.2 TP_SWDIO.TP U2.P$AC24
SWO: TP_SWO.TP U2.P$AD22
VBAT: C27.1 C37.1 IC1.C2 TP_VBAT.TP U3.2 U3.3
VBUS: C21.1 C38.2 C42.1 C43.1 D3.5 IC1.A2 J4.A4_B9 J4.A9_B4 U2.P$AD2
VREG: C23.2 C24.2 C39.2 IC1.B2 IC2.A1 IC2.A2 IC2.A3 TP_VREG.TP